# EAGLE board BoatBridge (EAGLE 7.1.0)
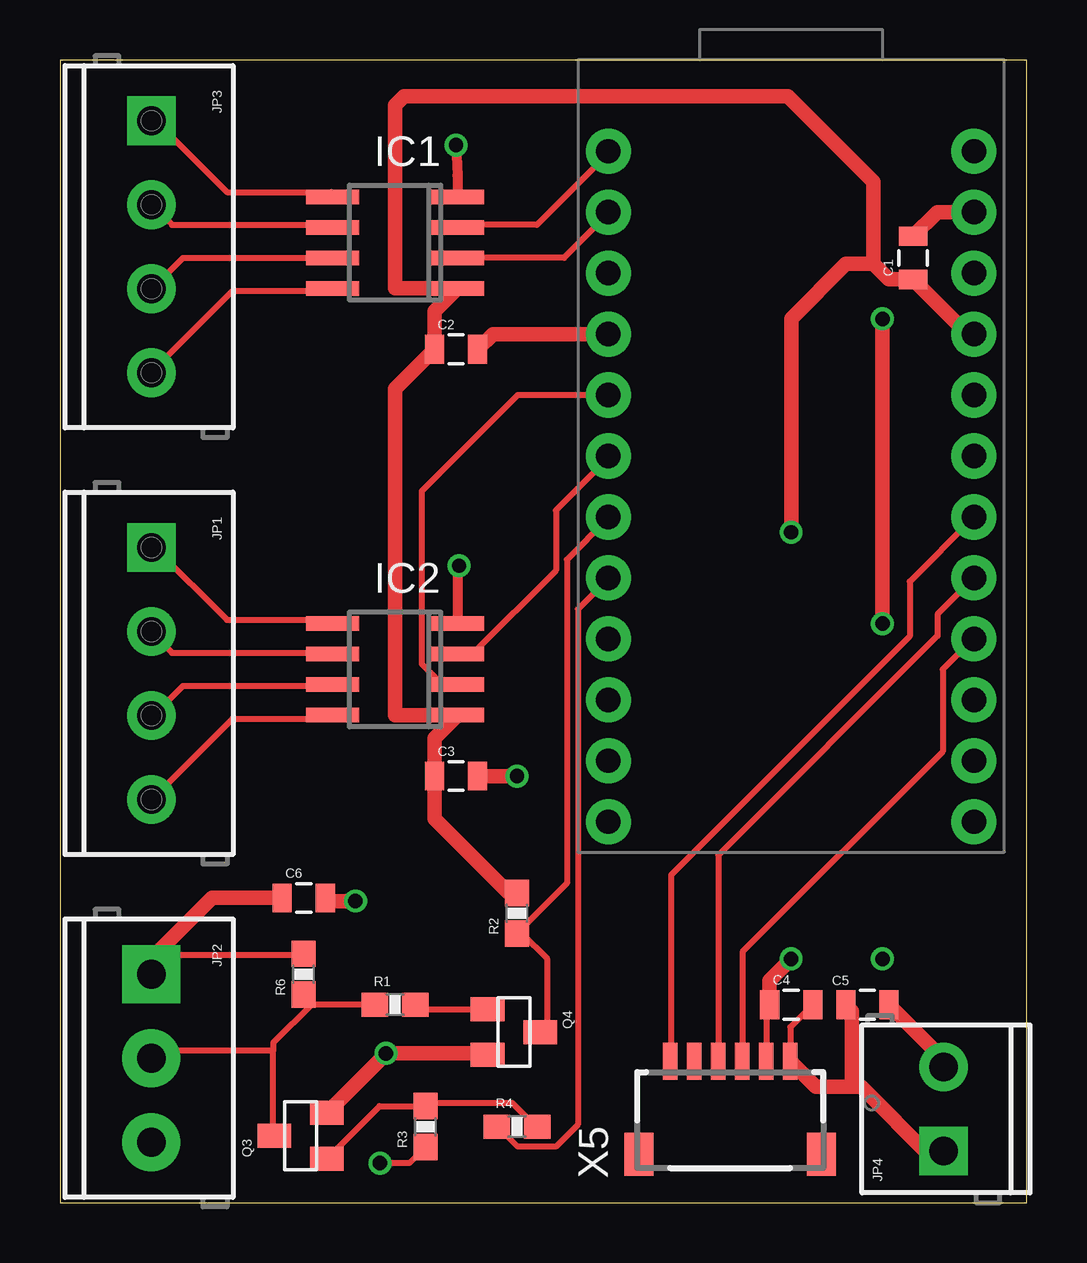
[diagram p0: board, top side]
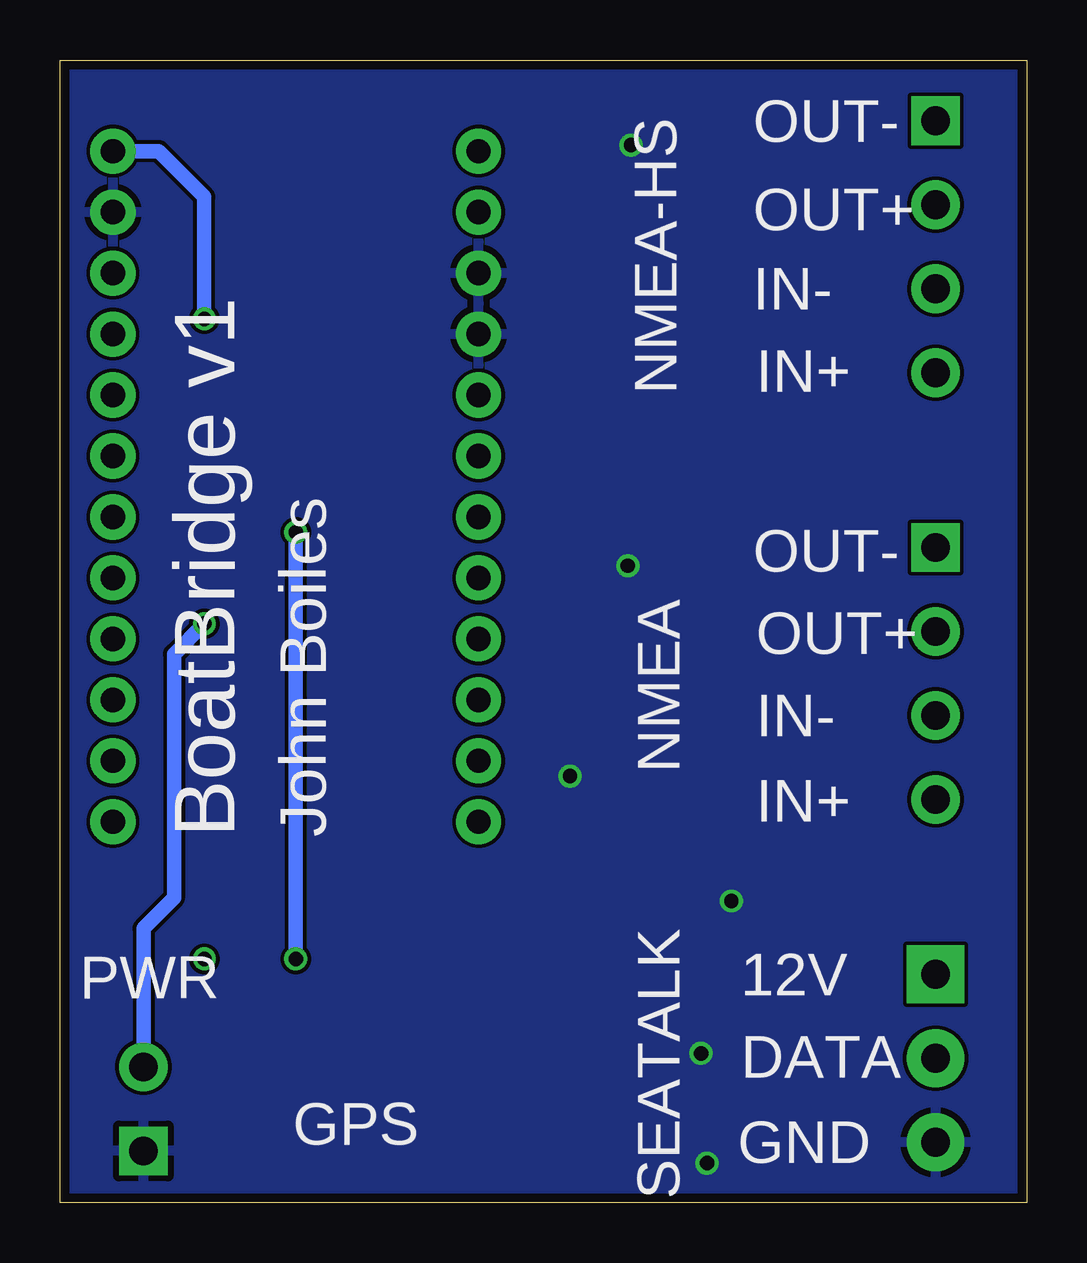
[diagram p1: board, bottom side, seen from below]

Size 40.31 x 47.62 mm. Coordinates in mm from the lower left corner, seen from the top.
Outline: 0,0 40.31,0 40.31,47.62 0,47.62 0,0
Copper layers (1*16): Top 0.0356mm / dielectric 1.5011mm / Bottom 0.0356mm
Design rules "OshPark *": minimum track width 6mil, minimum drill 13mil, track to track 6mil, track to pad 6mil, pad to pad 6mil, via to via 6mil, smd to smd 6mil, copper to edge 15mil, drill to drill 6mil, minimum pad ring 7mil, minimum via ring 7mil, stop-mask expansion 3mil, vias tented up to drill 25mil, thermal gap 10mil
Net classes: 1 power: width 0.254 mm

## Footprints (pad centres in the part's own frame; a part is rotated, then mirrored left to right if it is on the bottom)
0805 = smd 0.8 x 1.2: 1 -0.9,0; 2 0.9,0
SO08 = smd 0.6 x 2.2: 1 -1.905,-2.6; 2 -0.635,-2.6; 3 0.635,-2.6; 4 1.905,-2.6; 5 1.905,2.6; 6 0.635,2.6; 7 -0.635,2.6; 8 -1.905,2.6
SCREWTERMINAL-3.5MM-4 = drill 1.2 pad 2.032 square: 1 0,0 | drill 1.2 pad 2.032: 2 3.5,0; 3 7,0; 4 10.5,0
SCREWTERMINAL-3.5MM-3 = drill 1.2 pad 2.413 square: 1 0,0 | drill 1.2 pad 2.413: 2 3.5,0; 3 7,0
SCREWTERMINAL-3.5MM-2 = drill 1.2 pad 2.032 square: 1 0,0 | drill 1.2 pad 2.032: 2 3.5,0
SOT23 = smd 1 x 1.4: 1 -0.95,-1.1; 2 0.95,-1.1; 3 0,1.1
0603-RES = smd 1.1 x 1: 1 -0.85,0; 2 0.85,0
ARDUINO_PRO_MICRO = drill 1.016 pad 1.88: 1 -7.62,12.7; 2 -7.62,10.16; 3 -7.62,7.62; 4 -7.62,5.08; 5 -7.62,2.54; 6 -7.62,0; 7 -7.62,-2.54; 8 -7.62,-5.08; 9 -7.62,-7.62; 10 -7.62,-10.16; 11 -7.62,-12.7; 12 -7.62,-15.24; 13 7.62,-15.24; 14 7.62,-12.7; 15 7.62,-10.16; 16 7.62,-7.62; 17 7.62,-5.08; 18 7.62,-2.54; 19 7.62,0; 20 7.62,2.54; 21 7.62,5.08; 22 7.62,7.62; 23 7.62,10.16; 24 7.62,12.7
SM06B-SRSS-TB = smd 0.6 x 1.55: 1 -2.5,2.975; 2 -1.5,2.975; 3 -0.5,2.975; 4 0.5,2.975; 5 1.5,2.975; 6 2.5,2.975 | smd 1.2 x 1.8: FIT@1 -3.8,-0.9; FIT@2 3.8,-0.9

## Placement (x,y rotation side)
C1  [0805]  35.56,39.37 90 top
C2  [0805]  16.51,35.56 0 top
C3  [0805]  16.51,17.78 0 top
C4  [0805]  30.48,8.26 0 top
C5  [0805]  33.66,8.26 180 top
C6  [0805]  10.16,12.7 0 top
IC1  DS89C21  [SO08]  13.97,40.01 90 top
IC2  DS89C21  [SO08]  13.97,22.23 90 top
JP1  [SCREWTERMINAL-3.5MM-4]  3.81,27.3 270 top
JP2  [SCREWTERMINAL-3.5MM-3]  3.81,9.53 270 top
JP3  [SCREWTERMINAL-3.5MM-4]  3.81,45.09 270 top
JP4  M023.5MM  [SCREWTERMINAL-3.5MM-2]  36.83,2.16 90 top
Q3  [SOT23]  10.03,2.79 90 top
Q4  [SOT23]  18.92,7.11 270 top
R1  10k  [0603-RES]  13.97,8.26 0 top
R2  10k  [0603-RES]  19.05,12.06 90 top
R3  3.9k  [0603-RES]  15.24,3.17 90 top
R4  10k  [0603-RES]  19.05,3.17 0 top
R6  15k  [0603-RES]  10.16,9.53 90 top
U$1  ARDUINO_PRO_MICRO  [ARDUINO_PRO_MICRO]  30.48,31.11 0 top
X5  SM06B-SRSS-TB  [SM06B-SRSS-TB]  27.94,2.92 0 top

## Library data of the parts
C1-C6 = SparkFun-Capacitors
IC1 IC2 = Johnboiles
JP1-JP4 = SparkFun-Connectors
Q3 Q4 = SparkFun-DiscreteSemi
R1-R4 R6 = SparkFun-Passives
U$1 = SparkFun-Boards
X5 = con-jst2

## Nets
5V [power]: C1.1 C2.1 C3.1 C4.1 IC1.1 IC2.1 R2.2 U$1.21 X5.5
GND: C1.2 C2.2 C3.2 C4.2 C5.2 C6.2 IC1.4 IC2.4 JP2.3 JP4.1 Q3.2 Q4.2 R3.1 U$1.3 U$1.4 U$1.23 X5.6
GPS-PWRCTRL: U$1.18 X5.1
GPS-RX: U$1.17 X5.3
GPS-TX: U$1.16 X5.4
GPSVBAT: X5.2
N$1: Q4.1 R1.2
N$4: Q3.1 R3.2 R4.2
NMEA-HS-IN+: IC1.8 JP3.4
NMEA-HS-IN-: IC1.7 JP3.3
NMEA-HS-OUT+: IC1.6 JP3.2
NMEA-HS-OUT-: IC1.5 JP3.1
NMEA-HS-RX: IC1.2 U$1.2
NMEA-HS-TX: IC1.3 U$1.1
NMEA-IN+: IC2.8 JP1.4
NMEA-IN-: IC2.7 JP1.3
NMEA-OUT+: IC2.6 JP1.2
NMEA-OUT-: IC2.5 JP1.1
NMEA-RX: IC2.2 U$1.5
NMEA-TX: IC2.3 U$1.6
SEATALK-12V: C6.1 JP2.1 R6.2
SEATALK-DATA: JP2.2 Q3.3 R1.1 R6.1
SEATALK-RX: Q4.3 R2.1 U$1.7
SEATALK-TX: R4.1 U$1.8
VRAW: C5.1 JP4.2 U$1.24

## Tracks (layer width: path | path; a pad name or v marks a point on that pad's centre or on a via)
5V  (via drill 0.6)
  Top 0.254: C4.1 29.44,8.12 X5.5
  Top 0.61: 33.91,39.12 33.91,42.55 30.35,46.1 14.35,46.1 13.97,45.72 13.97,38.1 IC1.1 15.61,37.14 C2.1 13.97,33.92 13.97,20.32 IC2.1 15.61,19.36 C3.1 15.62,17.77 15.62,16 18.71,12.91 R2.2 | 33.91,39.12 34.55,38.47 C1.1 37.84,36.2 U$1.21 | v30.48,10.16 29.58,9.26 C4.1 | v30.48,27.94 30.48,36.83 32.77,39.12 33.91,39.12
  Bottom 0.61: v30.48,27.94 v30.48,10.16
GND  (via drill 0.6)
  Top 0.254: C4.2 30.44,7.32 X5.6 | v13.59,6.22 16.19,6.16 | R3.1 14.57,1.65 v13.34,1.65
  Top 0.406: v16.64,26.54 16.57,26.29 IC2.4 | v16.51,44.07 16.57,42.8 IC1.4
  Top 0.61: X5.6 31.51,4.83 33.02,4.83 | 33.02,4.83 33.4,4.83 36.32,1.91 JP4.1 | C1.2 36.56,41.27 U$1.23 | C5.2 33.02,7.99 33.02,4.83 | C3.2 v19.05,17.78 | C2.2 18.05,36.2 U$1.4 | Q3.2 13.61,6.22 v13.59,6.22 17.76,6.22 Q4.2 | C6.2 11.19,12.57 v12.32,12.57
  pour Bottom: 0.38,0.38 39.88,0.38 40.01,47.24 0.38,47.24
GPS-PWRCTRL
  Top 0.254: X5.1 25.48,5.99 25.48,13.65 35.42,23.6 35.42,25.88 38.05,28.51 U$1.18
GPS-RX
  Top 0.254: U$1.17 36.58,24.51 36.58,23.62 27.44,14.49 X5.3
GPS-TX
  Top 0.254: X5.4 28.45,5.99 28.45,10.45 36.79,18.8 36.79,22.23 38.05,23.48 U$1.16
N$1
  Top 0.254: R1.2 14.73,8.05 14.74,8.06 Q4.1
N$4
  Top 0.254: R4.2 19.76,3.25 18.85,4.17 15.42,4.17 R3.2 13.31,4.03 Q3.1
N$5  (via drill 0.6)
  other vias: 34.29,10.16
NMEA-HS-IN+
  Top 0.254: IC1.8 11.3,38 7.19,38 3.99,34.8 JP3.4
NMEA-HS-IN-
  Top 0.254: IC1.7 5.13,39.37 3.99,38.23 JP3.3
NMEA-HS-OUT+
  Top 0.254: IC1.6 11.3,40.74 4.67,40.74 3.99,41.43 JP3.2
NMEA-HS-OUT-
  Top 0.254: IC1.5 11.3,42.11 6.96,42.11 3.99,45.09 JP3.1
NMEA-HS-RX
  Top 0.254: IC1.2 21.02,39.37 22.85,41.2 U$1.2
NMEA-HS-TX
  Top 0.254: IC1.3 16.68,40.74 19.88,40.74 22.85,43.71 U$1.1
NMEA-IN+
  Top 0.254: IC2.8 11.3,20.17 7.19,20.17 3.99,16.97 JP1.4
NMEA-IN-
  Top 0.254: IC2.7 11.3,21.54 5.13,21.54 3.99,20.4 JP1.3
NMEA-OUT+
  Top 0.254: IC2.6 11.3,22.91 4.67,22.91 3.99,23.6 JP1.2
NMEA-OUT-
  Top 0.254: IC2.5 11.3,24.28 6.96,24.28 3.99,27.25 JP1.1
NMEA-RX
  Top 0.254: U$1.5 19.07,33.66 15.07,29.65 15.07,22.45 15.88,21.65 16.56,21.65 IC2.2
NMEA-TX
  Top 0.254: IC2.3 16.68,22.91 17.25,22.91 20.68,26.34 20.68,28.85 22.85,31.03 U$1.6
SEATALK-12V
  Top 0.254: R6.2 10.16,10.34 4.67,10.34 3.87,9.54 JP2.1
  Top 0.61: C6.1 6.35,12.7 3.81,10.16 JP2.1
SEATALK-DATA
  Top 0.254: 10.5,8.28 13.02,8.28 R1.1 | 10.5,8.28 R6.1 | 10.5,8.28 8.89,6.67 8.89,6.35 | JP2.2 4.13,6.35 8.89,6.35 | Q3.3 8.89,2.84 8.89,6.35
SEATALK-RX
  Top 0.254: 18.85,11.02 R2.1 | R2.1 19.07,11.25 21.13,13.31 21.13,26.8 22.85,28.51 U$1.7 | Q4.3 20.32,7.41 20.32,10.16 19.27,11.21 R2.1
SEATALK-TX
  Top 0.254: R4.1 18.27,3.14 19.07,2.34 20.68,2.34 21.59,3.25 21.59,24.74 22.85,26 U$1.8
VRAW  (via drill 0.6)
  Top 0.61: C5.1 36.83,5.98 JP4.2 | v34.29,24.13 v34.29,36.83
  Bottom 0.61: v34.29,36.83 34.29,41.91 36.2,43.81 U$1.24 | v34.29,24.13 35.56,22.86 35.56,12.7 36.83,11.43 JP4.2

## Text on the board
bNames: NMEA-HS | OUT- | OUT+ | IN- | IN+ | OUT- | NMEA | OUT+ | IN- | IN+ | John Boiles | BoatBridge v1 | SEATALK | 12V | PWR | DATA | GND | GPS
bDocu: + | -